# Altium PCB DIOT_Backplane_Mezzaine.PcbDoc
Units mm, origin at the board's own origin, x right, y up, seen from the top; angles counter-clockwise.
Board outline 50 x 112 mm, 4 copper layers (Top Layer, Layer 1, Layer 2, Bottom Layer), stack 1.58 mm thick; 34 components, 13 nets, 111 pads, 310 vias.
Unrouted connection lines stored in the file: 2.
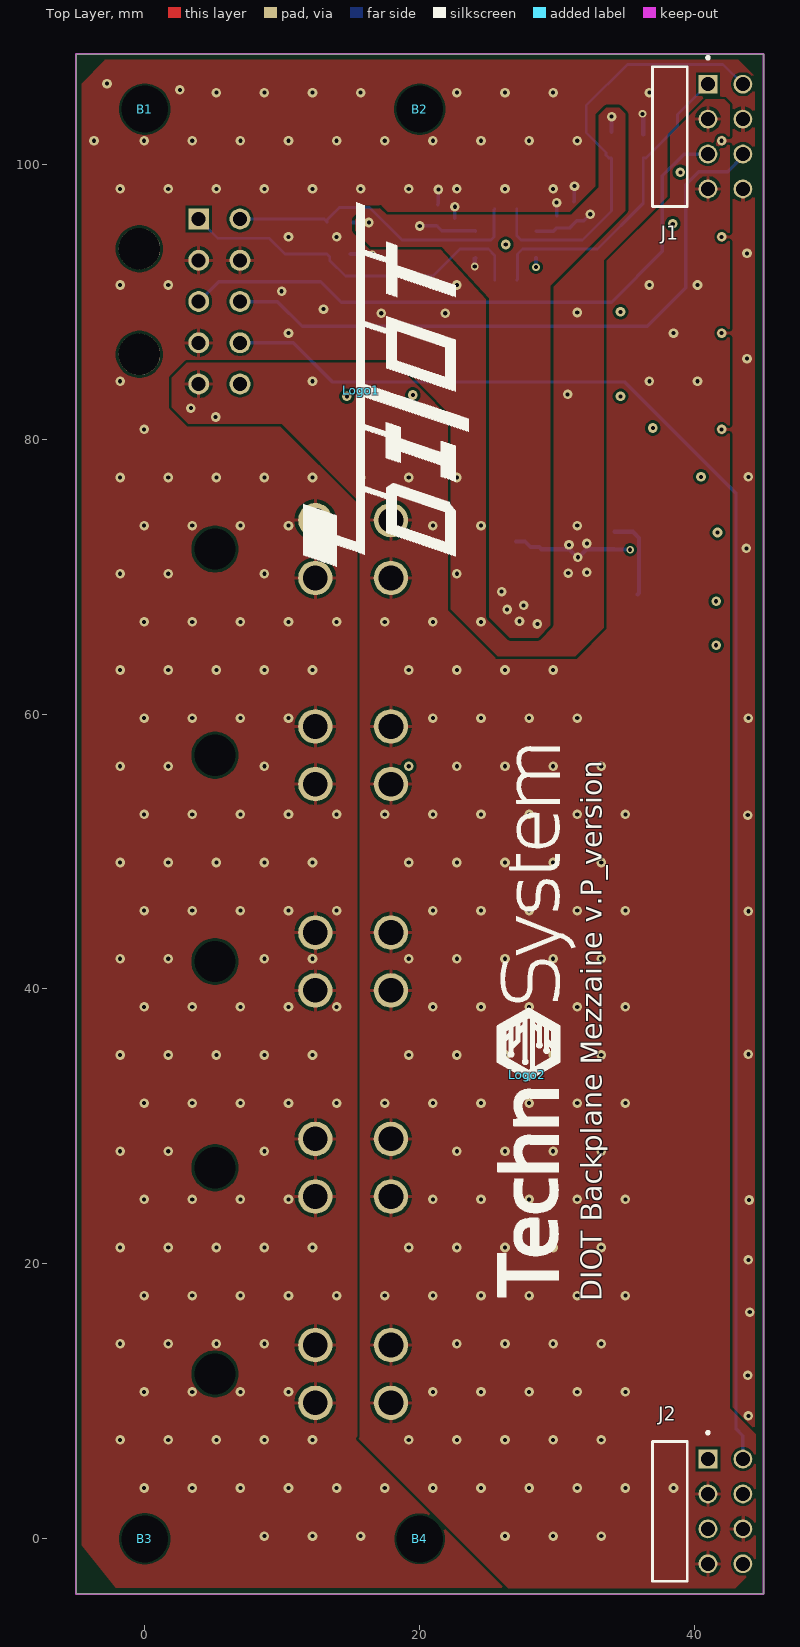
[diagram p0: Top Layer view]
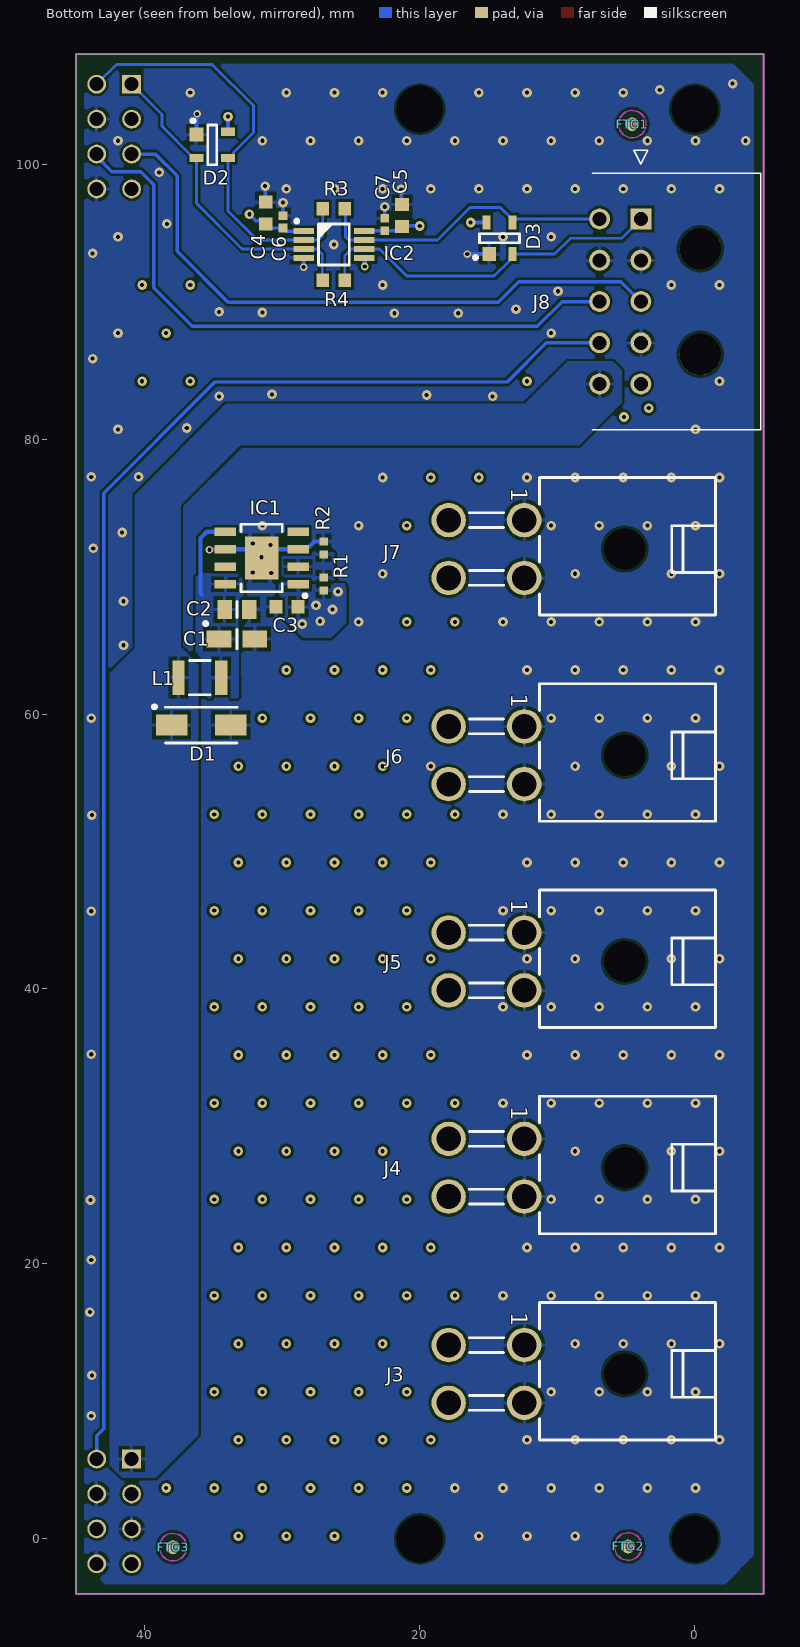
[diagram p1: Bottom Layer view, seen from below]
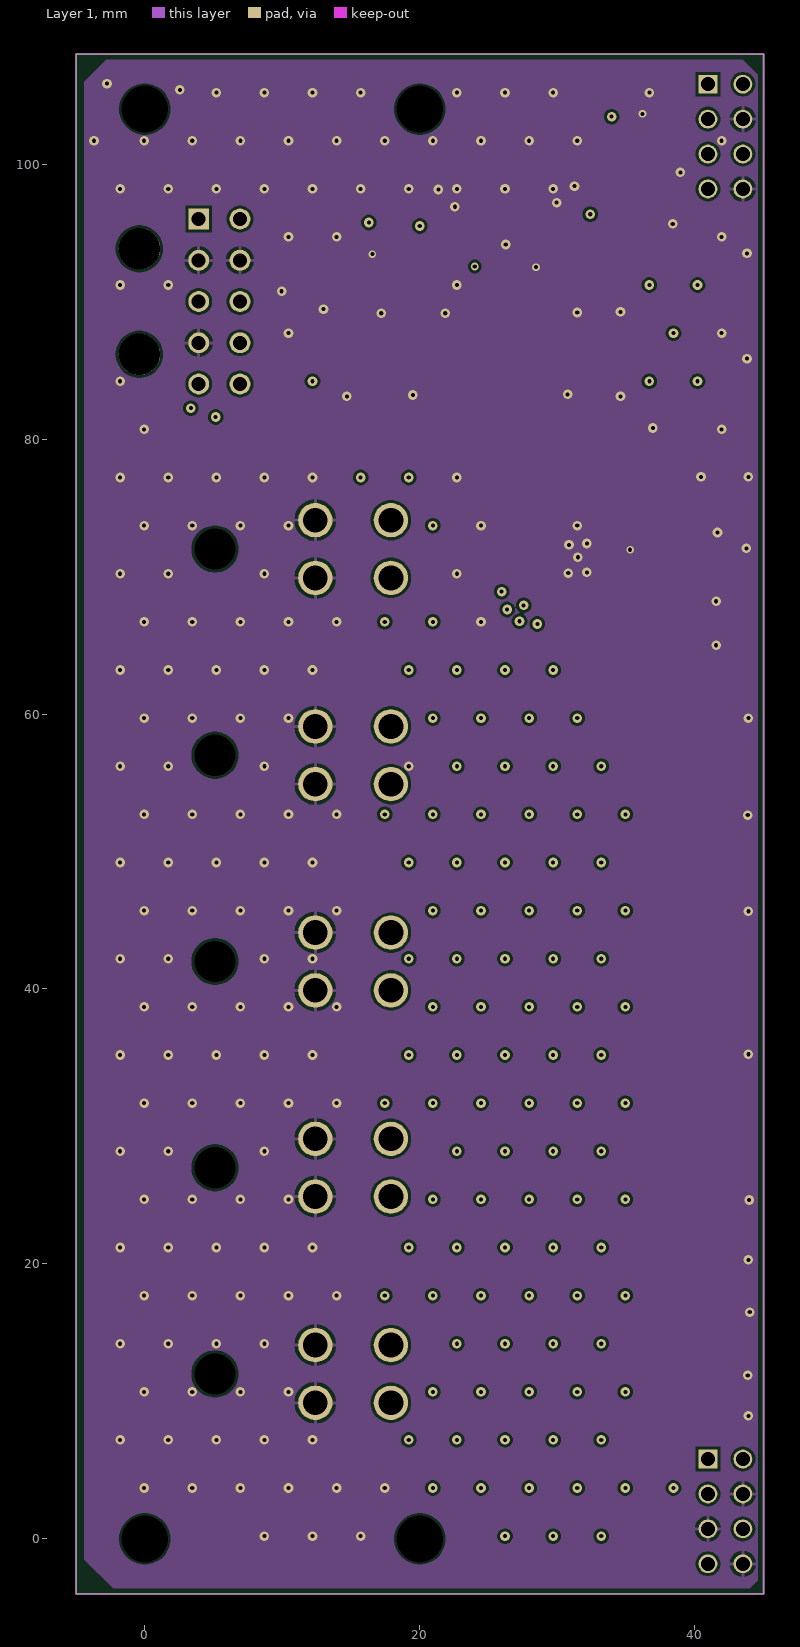
[diagram p2: Layer 1]
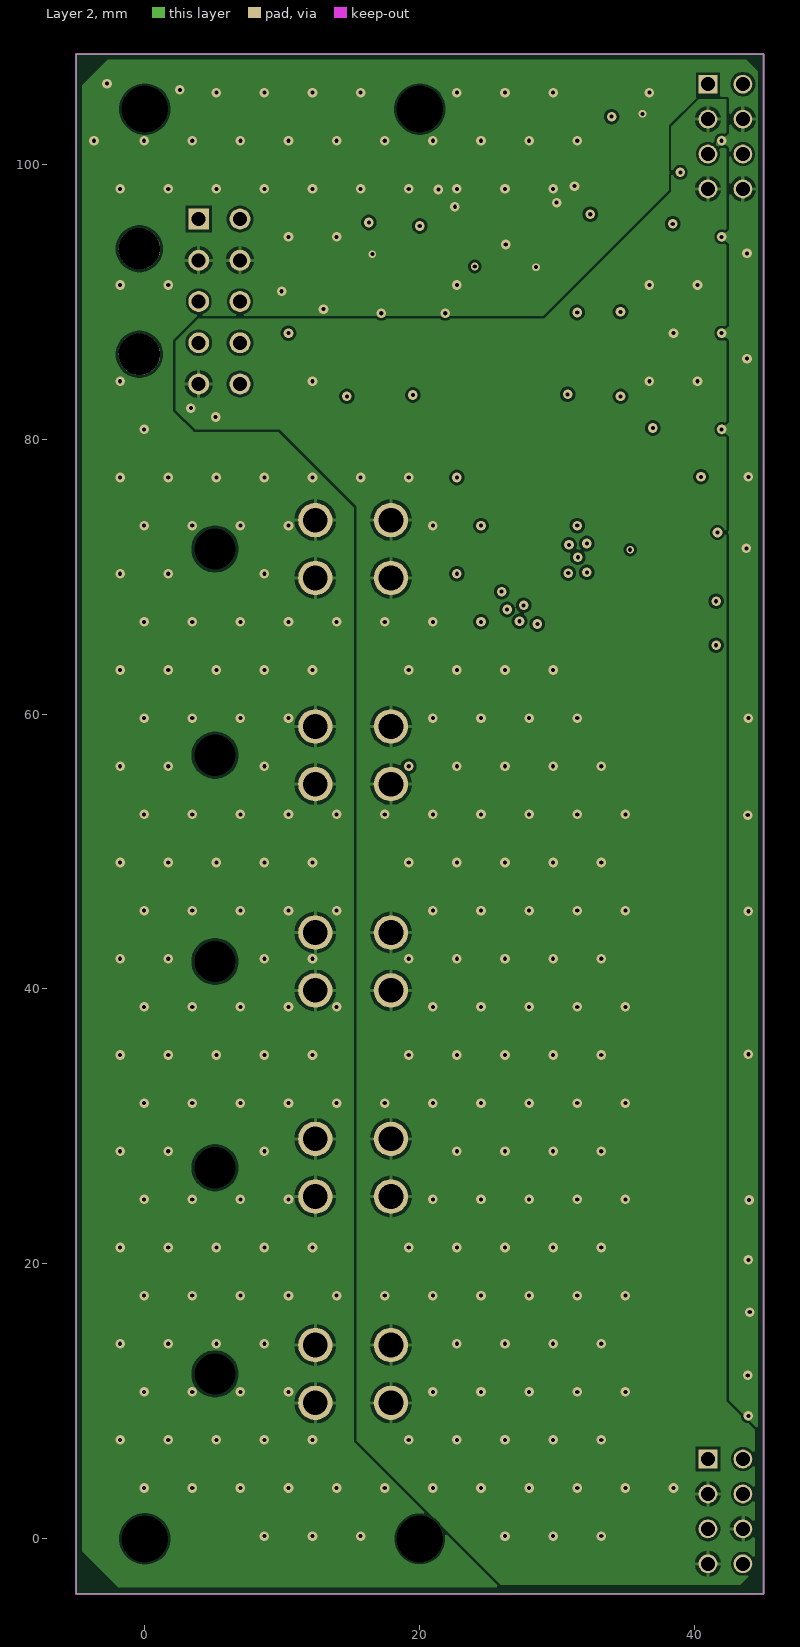
[diagram p3: Layer 2]
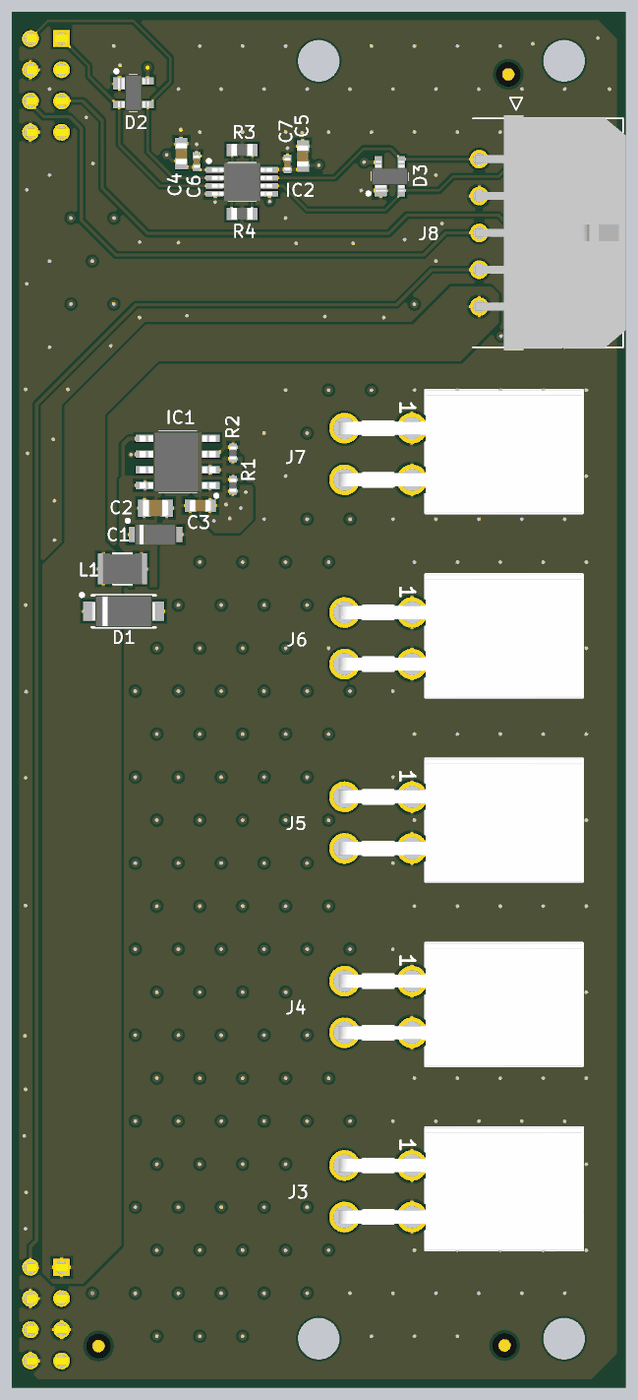
[diagram p4: 3D render of the assembled board from below, using the file's embedded part models]

## Layer stack, top to bottom
Top Solder: solder mask 0.01, Solder Resist, Dk 3.5
Top Layer: signal copper 0.035
Dielectric 1: prepreg 0.12, PP-017, Dk 4.3
Layer 1: signal copper 0.035
Dielectric1: core 1.2, FR-4, Dk 4.8
Layer 2: signal copper 0.035
Dielectric 4: prepreg 0.12, PP-017, Dk 4.3
Bottom Layer: signal copper 0.035
Bottom Solder: solder mask 0.01, Solder Resist, Dk 3.5

## Board outline
-5,-4 -5,108 45,108 45,-4

## Design rules (kind name [scope] priority, off if disabled: settings)
AcuteAngle [All] p1: minimum=4.50000000000000E+0001 checktracksonly=FALSE
BoardOutlineClearance [All] p1: gap=0.254 ignorepadtopadclearanceinfootprint=FALSE except(0: Arc-SplitContinuation Track-SplitContinuation SMDPad-SplitContinuation THPad-SplitContinuation Via-SplitContinuation Fill-SplitContinuation Poly-SplitContinuation Region-SplitContinuation Text-SplitContinuation; 0.4: Poly-OutlineEdge)
Clearance Clearance_Holes [InComponent('B1','B2','B3','B4')] p1: gap=0.15 ignorepadtopadclearanceinfootprint=FALSE
Clearance [All] p2: gap=0.2 ignorepadtopadclearanceinfootprint=FALSE
ComponentClearance [All] p1 off: gap=0 collisioncheckmode=3 verticalgap=0 showdistances=FALSE
FabricationTestPointUsage TestPointUsage [All] p1: valid=0 allowmultiple=FALSE
FabricationTestpoint Testpoint [(IsPad And (OnTopLayer Or OnBottomLayer))] p1: side=3 testpointundercomponent=TRUE minsize=1.016 maxsize=2.54 preferedsize=1.524 minholesize=0 maxholesize=1.016 preferedholesize=0.813 testpointgrid=0.025 allowsidetop=TRUE allowsidebottom=TRUE usegrid=TRUE gridtolerance=0
Height Height_Top [OnTop] p1 off: minheight=0 maxheight=12.7 prefheight=8.89
Height Height_Bot [OnBottom] p2 off: minheight=0 maxheight=1.651 prefheight=1.321
HoleSize [All] p1: absolutevalues=TRUE maxlimit=25.4 minlimit=0.025 maxpercent=80.000 minpercent=20.000
HoleToHoleClearance [All] p1: gap=0.127 allowstackedmicrovias=TRUE
Length [InNetClass('ADC0_D') or InNetClass('ADC1_D') or InNetClass('ADC1_D') or InNetClass('ADC3_D')] p1 off: maxlimit=17.5 minlimit=13.5
MatchedLengths [InNetClass('ADC0_D') or InNetClass('ADC1_D') or InNetClass('ADC1_D') or InNetClass('ADC3_D')] p1 off: tolerance=1 checknetsindiffpair=TRUE checkdiffpairvsdiffpair=FALSE checkxsignals=FALSE checkothers=FALSE
MinimumSolderMaskSliver [All] p1 off: minsoldermaskwidth=0.025
PlaneClearance [All] p1: clearance=0.254
PlaneConnect Vias_Plane [IsVia] p1: planeconnectstyle=Direct reliefexpansion=0.508 reliefentries=4 reliefconductorwidth=0.254 reliefairgap=0.254
PlaneConnect PlaneConnect_1 [All] p2: planeconnectstyle=Relief reliefexpansion=0.203 reliefentries=4 reliefconductorwidth=0.203 reliefairgap=0.203
PolygonConnect Direc [InPadClass(Direc)] p1: connectstyle=Direct reliefconductorwidth=0.254 reliefentries=4 polygonreliefangle="90 Angle" airgapwidth=0.254
PolygonConnect Vias [IsVia] p2: connectstyle=Direct reliefconductorwidth=0.254 reliefentries=4 polygonreliefangle="90 Angle" airgapwidth=0.254
PolygonConnect PolygonConnect_1 [All] p3: connectstyle=Relief reliefconductorwidth=0.254 reliefentries=4 polygonreliefangle="90 Angle" airgapwidth=0.254
RoutingVias [All] p1: holewidth=0.3 width=0.7 viastyle="Through Hole" minholewidth=0.2 minwidth=0.3 maxholewidth=0.4 maxwidth=0.8
SilkToSilkClearance [All] p1 off: silktosilkclearance=0.025
SilkToSolderMaskClearance SilkscreenOverComponentPads [IsPad] p1 off: minsilkscreentomaskgap=0.051 clearancetoexposedcopper=TRUE
SolderMaskExpansion SolderMaskExpansion_Via [IsVia] p1: expansion=0 istentingtop=TRUE
SolderMaskExpansion [All] p2: expansion=0.075 istentingtop=FALSE
SupplyNets "Schematic Supply Nets_1" [InNet('P3V3')] p1: voltage=0.000
SupplyNets "Schematic Supply Nets_3" [InNet('P5V')] p2: voltage=0.000
SupplyNets "Schematic Supply Nets_2" [InNet('GND')] p3: voltage=0.000
SupplyNets "Schematic Supply Nets" [InNet('P12V')] p4: voltage=0.000
UnRoutedNet [All] p1: checkbadconnections=TRUE
ViasUnderSMD [All] p1: allowed=TRUE
Width [All] p1: maxlimit=2.54 minlimit=0.123 preferedwidth=0.254 toplayer_minwidth=0.135 midlayer1_prefwidth=0.123 midlayer2_minwidth=0.127 midlayer2_prefwidth=0.127 bottomlayer_minwidth=0.135 minimp=50.000000 maximp=50.000000 favimp=50.000000
18 further rules are at their usual default settings.

## Components (designator, comment, footprint, x,y, rotation, side; value= is the part's Value field where it differs from the comment)
B1 "NON-PLATED_3.4" MTG340 0,104 r0 top
B2 "NON-PLATED_3.4" MTG340 20,104 r0 top
B3 "NON-PLATED_3.4" MTG340 0,0 r0 top
B4 "NON-PLATED_3.4" MTG340 20,0 r0 top
C1 "10uF" CAPMP3216X180N 33.3,65.45 r180 bottom
C2 "10uF" CAPC2012X135N 33.3,67.6 r180 bottom
C3 "1uF" CAPC1608X87N 29.65,67.8 r180 bottom
C4 "1uF" CAPC1608X87N 31.2,96.45 r270 bottom
C5 "1uF" CAPC1608X87N 21.3,96.25 r90 bottom
C6 "100nF" CAPC1005X55N 29.95,95.8 r270 bottom
C7 "100nF" CAPC1005X55N 22.55,95.6 r90 bottom
D1 "SMAJ5.0A" DIOM5226X262N 35.9,59.2 r180 bottom
D2 "PRTR5V0U2X" SOT190P230X110-4N 35.1,101.4 r180 bottom
D3 "PRTR5V0U2X" SOT190P230X110-4N 14.2,94.6 r90 bottom
FTG1 "Use only in PCB" FIDUCIAL_TOP_C100-200 4.55,102.9 r90 bottom
FTG2 "Use only in PCB" FIDUCIAL_TOP_C100-200 4.85,-0.55 r90 bottom
FTG3 "Use only in PCB" FIDUCIAL_TOP_C100-200 37.95,-0.6 r90 bottom
IC1 "ADP7102ARDZ-R7" SOIC127P600X175-9N-R241X309 31.5,71.35 r0 bottom
IC2 "TCA9803DGK" SOP65P490X110-8N 26.25,94.15 r180 bottom
J1 "TSW-104-08-F-D-RA" TSW-104-08-F-D-RA 40.96,102 r270 top locked
J2 "TSW-104-08-F-D-RA" TSW-104-08-F-D-RA 40.96,2 r270 top locked
J3 "Mini-Fit Jr.™" MOLEX_39-30-0040 15.15,12 r270 bottom locked
J4 "Mini-Fit Jr.™" MOLEX_39-30-0040 15.15,27 r270 bottom locked
J5 "Mini-Fit Jr.™" MOLEX_39-30-0040 15.15,42 r270 bottom locked
J6 "Mini-Fit Jr.™" MOLEX_39-30-0040 15.15,57 r270 bottom locked
J7 "Mini-Fit Jr.™" MOLEX_39-30-0040 15.15,72 r270 bottom locked
J8 "43045-1000" 43045-1000 3.92,90 r90 bottom locked
L1 "10uH" IND_MURATA_LQW32FT_0H 36,62.65 r180 bottom
Logo1 "DIOT_logo" DIOT_logo 15.75,83.55 r90 top
Logo2 "TS_Logo" TS_Logo 27.8,33.75 r90 top
R1 "51k" RESC1005X40N 27,69.45 r270 bottom
R2 "30k" RESC1005X40N 27,72.08 r270 bottom
R3 "0" RESC1608X55N 26.25,96.75 r180 bottom
R4 "0" RESC1608X55N 26.25,91.55 r180 bottom

## Footprints (in the part's own frame and the unit in brackets; to place one, negate y for a bottom-side part, rotate by r counter-clockwise, add the part's x,y. Pads: shape width x height; smd on the part's side, far side on the other; paste and mask are expansions set on the pad)
43045-1000 [mm]
  rect 1.52x1.52 hole 1.02: 1(6,0)
  round 1.52 hole 1.02: 2(3,0) 3(0,0) 4(-3,0) 5(-6,0) 6(6,3) 7(3,3) 8(0,3) 9(-3,3) 10(-6,3)
  round 3 hole 3 unplated: 11(3.84,-4.32) 12(-3.84,-4.32)
  silkscreen extent -9.33,-8.72 11,3.52, body extent -9.57,-8.92 9.57,3.32, height 8.67
CAPC1005X55N [mm] "Capacitor, Non-Polarized, Chip; 1.00mm L X 0.50mm W X 0.70mm H, IPC Medium Density"
  rect 0.62x0.62 smd: 1(-0.45,0) 2(0.45,0)
  body extent -0.52,-0.27 0.53,0.28, height 0.55
CAPC1608X87N [mm] "Chip Capacitor, Body 1.6x0.8mm IPC Medium Density"
  rect 0.95x1 smd: 1(-0.8,0) 2(0.8,0)
  body extent -0.87,-0.47 0.88,0.48, height 0.87
CAPC2012X135N [mm] "Chip Capacitor, Body 2.0x1.25mm, IPC Medium Density"
  rect 1.05x1.4 smd: 1(-0.9,0) 2(0.9,0)
  silkscreen extent 0,-0.58 0,0.58, body extent -1.05,-0.67 1.05,0.68, height 1.25
CAPMP3216X180N [mm] "Capacitor, Polarized, Molded  Body 3.2x1.6mm, IPC Medium Density"
  rect 1.8x1.25 smd: 1(-1.3,0) 2(1.3,0)
  silkscreen extent -2.4,-0.7 0,1.25, body extent -1.7,-0.9 1.7,0.9, height 1.6
DIOM5226X262N [mm] "DO-214-AC/SMA Diode, Molded Body; 5.21mm L X 2.605mm W X 2.62mm H, IPC Medium Density"
  rect 2.3x1.55 smd: 1(-2.15,0) 2(2.15,0)
  silkscreen extent -3.53,-1.3 2.6,1.45, body extent -2.6,-1.3 2.6,1.31, height 2.62
DIOT_logo [mm]
  silkscreen extent -12.83,-7.81 13.66,4.24
FIDUCIAL_TOP_C100-200 [mm] "Round Fiducial Target, Top Layer, 1.0mm, Top Solder 2.0mm, Keepout =2.0mm"
  round 1 smd paste-0.51 mask+0.5: FTG2(0,0)
  Top Layer keep-out circle w0.1: c0,0 r1
IND_MURATA_LQW32FT_0H [mm] "SMT inductor 1210, Body Width 2.50mm Body Lenght 3.20mm Height 2.50mm"
  rect 0.9x2.5 smd: 1(-1.55,0) 2(1.55,0)
  silkscreen extent -0.75,-1.25 0.75,1.25, body extent -1.6,-1.25 1.6,1.25, height 2.5
MOLEX_39-30-0040 [mm] "4.20mm (.165\") Pitch Mini-Fit Jr. Header, Dual Row, Right Angle with Snap-in Plastic Peg PCB Lock, 4 Circuits"
  round 2.5 hole 1.8: 1(-2.1,2.75) 2(2.1,2.75) 3(-2.1,-2.75) 4(2.1,-2.75)
  round 1 hole 3 unplated mask+1: 5(0,10.05)
  silkscreen extent -5.2,-1.24 4.8,16.65, body extent -5.2,-3.28 4.8,16.65, height 11.4
MTG340 [mm]
  round 0.5 hole 3.4 unplated mask+1.35: 1(0,0)
RESC1005X40N [mm] "Chip Resistor, EIA 0402, Metric 1005, Body 1.0x0.5mm, IPC Medium Density"
  rect 0.58x0.62 smd: 1(-0.47,0) 2(0.47,0)
  body extent -0.52,-0.27 0.53,0.28, height 0.4
RESC1608X55N [mm] "Chip Resistor, EIA 0603, Metric 1608, Body 1.6x0.8mm, IPC Medium Density"
  rect 0.9x1 smd: 1(-0.8,0) 2(0.8,0)
  body extent -0.87,-0.47 0.88,0.48, height 0.55
SOIC127P600X175-9N-R241X309 [mm] "SOIC 8, Pitch 1.27mm - Body 3.9x4.9mm, (w/thermal tab 2.41mm X 3.098mm), IPC Medium Density"
  rect 1.55x0.6 smd: 1(-2.65,1.905) 2(-2.65,0.635) 3(-2.65,-0.635) 4(-2.65,-1.905) 5(2.65,-1.905) 6(2.65,-0.635) 7(2.65,0.635) 8(2.65,1.905)
  rect 2.41x3.098 smd: 9(0,0)
  silkscreen extent -3.27,-2.45 1.5,2.87, body extent -3.1,-2.5 3.1,2.5, height 1.75
SOP65P490X110-8N [mm] "SOP, 0.65mm pitch; 8 pin, 3.00mm W X 3.00mm L X 1.10mm H body, IPC Medium Density"
  rect 1.5x0.45 smd: 1(-2.2,0.975) 2(-2.2,0.325) 3(-2.2,-0.325) 4(-2.2,-0.975) 5(2.2,-0.975) 6(2.2,-0.325) 7(2.2,0.325) 8(2.2,0.975)
  silkscreen extent -2.83,-1.5 1.12,1.82, body extent -2.45,-1.55 2.45,1.55, height 1.1
SOT190P230X110-4N [mm] "SOT143, SOT, 1.90mm Pitch; 4 Pin, 1.30mm W X 2.90mm L X 1.10mm H body, IPC Medium Density"
  rect 1x1 smd: 1(-1.15,0.75)
  rect 1x0.6 smd: 2(-1.15,-0.95) 3(1.15,-0.95) 4(1.15,0.95)
  silkscreen extent -1.53,-1.45 0.33,1.87, body extent -1.25,-1.5 1.25,1.5, height 1.1
TS_Logo [mm]
  silkscreen extent -16.14,-3.52 23.86,2.11
TSW-104-08-F-D-RA [mm]
  rect 1.37x1.37 hole 1.02: 1(-3.81,0)
  round 1.37 hole 1.02: 2(-3.81,2.54) 3(-1.27,0) 4(-1.27,2.54) 5(1.27,0) 6(1.27,2.54) 7(3.81,0) 8(3.81,2.54)
  silkscreen extent -5.83,-4.04 5.08,0.1, body extent -5.08,-9.91 5.08,2.86, height 5.56

## Part data
B1 B2 B3 B4: library part CMP-00028-00013-2, "Non Plated hole with diameter 3.4MM for screw M3"
C1: library part CTE3216-18_10UF_16V_20%_AVX_TCJ, "Polarised capacitor", Case=A, Manufacturer=AVX, Manufacturer Part Number="TCJA106M016R0200 or  or TR3A106K016C1700", Tolerance=±20%, Voltage=16V, Author="CERN DEM JLC", Component Type=Standard, ComponentHeight=1.8mm, CreateDate=29.03.2012, HelpURL=\\cern.ch\dfs\Applications\Altium\Datasheets\CTE_AVX_TCJ.pdf, LatestRevisionDate=29.03.2012, Mounted=Yes, Part Description="ESR 0R200 Tantalum Solid Electrolytic Chip Capacitor with Conductive Polymer Electrode", Part Number=CTE3216-18_10UF_16V_20%_AVX_TCJ, Pin Count=2, Sense=No, SMD=Yes, Socket=No, Status=Preferred
C2: library part CC0805_10UF_16V_10%_X5R, "Non-polarised capacitor", Case=0805, Manufacturer=GENERIC, Manufacturer1 ComponentHeight=1.4mm, Manufacturer1 Example=KEMET, Manufacturer1 Part Number=C0805C106K4PAC, Tolerance=±10%, Voltage=16V, Author="CERN DEM JLC", Component Type=Standard, CreateDate=03.12.2007, HelpURL=\\cern.ch\dfs\Applications\Altium\Datasheets\CC1206_X5R_KEMET.pdf, LatestRevisionDate=03.12.2007, Manufacturer Part Number=CC0805_10UF_16V_10%_X5R, Mounted=Yes, Part Description="SMD Multilayer Chip Ceramic Capacitor", Part Number=CC0805_10UF_16V_10%_X5R, Pin Count=2, Sense=No, SMD=Yes, Socket=No, Status=Preferred, TC=X5R
C3 C4 C5: library part CC0603_1UF_25V_10%_X7R, "Non-polarised capacitor", Case=0603, Manufacturer=GENERIC, Manufacturer1 ComponentHeight=0.9mm, Manufacturer1 Example=MURATA, Manufacturer1 Part Number=GRM188R71E105KA12D, Tolerance=±10%, Voltage=25V, Author="CERN DEM JLC", Component Type=Standard, CreateDate=18/01/2011, HelpURL=\\cern.ch\dfs\Applications\Altium\Datasheets\CC0603_X7R_MURATA.pdf, LatestRevisionDate=18/01/2011, Manufacturer Part Number=CC0603_1UF_25V_10%_X7R, Mounted=Yes, Part Description="SMD Multilayer Chip Ceramic Capacitor", Part Number=CC0603_1UF_25V_10%_X7R, Pin Count=2, Sense=No, SMD=Yes, Socket=No, Status=None, TC=X7R
C6 C7: library part CC0402_100NF_16V_10%_X7R, "Non-polarised capacitor", Case=0402, Manufacturer=GENERIC, Manufacturer1 ComponentHeight=0.55mm, Manufacturer1 Example=MURATA, Manufacturer1 Part Number=GRM155R71C104KA88D, Tolerance=±10%, Voltage=16V, Author="CERN DEM JLC", Component Type=Standard, CreateDate=05.12.2013, HelpURL=\\cern.ch\dfs\Applications\Altium\Datasheets\CC0402_X7R_MURATA_GRM.pdf, LatestRevisionDate=03.12.2007, Manufacturer Part Number=CC0402_100NF_16V_10%_X7R, Mounted=Yes, Part Description="SMD Multilayer Chip Ceramic Capacitor", Part Number=CC0402_100NF_16V_10%_X7R, Pin Count=2, Sense=No, SMD=Yes, Socket=No, Status="Not Recommended", TC=X7R
D1: "Transient Voltage Suppressor Diode (Uni-Directional)", Case=DO-214AC, Manufacturer=BOURNS, Power=400W, Voltage=5V, Author="CERN DEM MR", Bonding=No, Component Type=Standard, ComponentHeight=2.62mm, CreateDate=14.07.2016, Device=SMAJ5.0A, HelpURL=\\cern.ch\dfs\Applications\Altium\Datasheets\SMAJ5.0A.pdf, LatestRevisionDate=14.07.2016, Manufacturer Part Number=SMAJ5.0A, Mounted=Yes, PackageDescription="DO-214-AC/SMA Diode, Molded Body; 5.21mm L X 2.605mm W X 2.62mm H, IPC Medium Density", Part Description="Surface Mount Uni-directional Transient Voltage Suppressor Diode", Part Number=SMAJ5.0A, Pin Count=2, PressFit=No, Sense=No, SMD=Yes, Socket=No
D2 D3: "Ultra Low Capacitance Double Rail-to-Rail ESD Protection Diode", Case=SOT143B, Manufacturer="NXP SEMICONDUCTORS", Voltage=5.5V, Author="CERN DEM JLC", Bonding=No, Component Type=Standard, ComponentHeight=1.1mm, CreateDate=22.03.2011, Device=PRTR5V0U2X, HelpURL=\\cern.ch\dfs\Applications\Altium\Datasheets\PRTR5V0U2X.pdf, LatestRevisionDate=22.03.2011, Manufacturer Part Number=PRTR5V0U2X, Mounted=Yes, PackageDescription="SOT143B, SOT, 1.90mm Pitch; 4 Pin, 1.30mm W X 2.90mm L X 1.10mm H body, IPC Medium Density", Part Description="Ultra Low Capacitance (1pF) Double Rail-to-Rail ESD Protection Diode (8kV)", Part Number=PRTR5V0U2X, Pin Count=4, PressFit=No, Sense=No, SMD=Yes, Socket=No
FTG1 FTG2 FTG3: library part FIDUCIAL_TARGET_c100-200, "Fiducial Target", Part Number=FIDUCIAL_TARGET_C100-200, Author="CERN DEM JLC", Component Type="Standard (No BOM)", ComponentHeight=0mm, CreateDate=09/02/2010, Family=Fiducial, HelpURL=Undefined, LatestRevisionDate=04/04/2012, Mounted=No, PackageDescription="Round Fiducial Target, Top Layer, 1.0mm, Top Solder 2.0mm, Keepout =2.0mm", Part Description="Round Fiducial Target, Top Layer, 1.0mm, Top Solder 2.0mm, Keepout =2.0mm", Pin Count=1, Sense=No, SMD=Yes, Socket=No, Status=None
IC1: "1.22V to 19V, 300mA, Low Noise, CMOS LDO Adjustable Linear Regulator", Case=SOIC8, Manufacturer="ANALOG DEVICES", Author="CERN DEM JLC", Bonding=No, Component Type=Standard, ComponentHeight=1.75mm, CreateDate=16.06.2014, Device=ADP7102ARDZ-R7, HelpURL=\\cern.ch\dfs\Applications\Altium\Datasheets\ADP7102ARDZ-R7.pdf, LatestRevisionDate=16.06.2014, Manufacturer Part Number=ADP7102ARDZ-R7, Mounted=Yes, PackageDescription="SOIC 8, Pitch 1.27mm - Body 3.9x4.9mm, (w/thermal tab 2.41mm X 3.098mm), IPC Medium Density", Part Description="1.22V to 19V, 300mA, Low Noise, CMOS LDO Adjustable Linear Regulator", Part Number=ADP7102ARDZ-R7, Pin Count=8, PressFit=No, Sense=No, SMD=Yes, Socket=No
IC2: "Level-Translating I2C Bus Buffer/Repeater", Case=TSSOP8, Manufacturer="TEXAS INSTRUMENTS", Author="CERN DEM HF", Bonding=No, Component Type=Standard, ComponentHeight=1.1mm, CreateDate=09.08.2023, Device=TCA9803DGK, HelpURL=\\cern.ch\dfs\Applications\Altium\Datasheets\TCA9803DGK.pdf, LatestRevisionDate=09.08.2023, Manufacturer Part Number=TCA9803DGK, Mounted=Yes, PackageDescription="SOP, 0.65mm Pitch; 8 Pin, 3.00mm W X 3.00mm L X 1.10mm H body, IPC Medium Density", Part Description="Level-Translating I2C Bus Buffer/Repeater", Part Number=TCA9803DGK, Pin Count=8, PressFit=No, Sense=No, SMD=Yes, Socket=No
J1 J2: library part CMP-002-04654-4, "Board Connector, 8 Contact(s), 2 Row(s), Male, Right Angle, 0.1 inch Pitch, Solder Terminal, Black Insulator", Connector Type="BOARD CONNECTOR", Mounting Technology=Board, RoHS Compliant=Yes
J3 J4 J5 J6 J7: library part MOLEX_39-30-0040, "Connector 4 Male", Manufacturer=MOLEX, Manufacturer Part Number=39-30-0040, Author="CERN DEM JLC", Component Type=Standard, ComponentHeight=11.4mm, CreateDate=02.10.2018, Family="Mini-Fit Jr.™", HelpURL=\\cern.ch\dfs\Applications\Altium\Datasheets\MOLEX_39-30-0040.pdf, LatestRevisionDate=02.10.2018, Mounted=Yes, Part Description="4.20mm (.165\") Pitch Mini-Fit Jr. Header, Dual Row, Right Angle with Snap-in Plastic Peg PCB Lock, 4 Circuits", Part Number=MOLEX_39-30-0040, Pin Count=4, PressFit=No, Sense=No, SMD=No, Socket=No, Status=None
J8: library part CMP-002-04656-3, "Rectangular Power Connector, 10 Contact(s), Male, Solder Terminal, Receptacle", Max Operating Temperature=105°C, Min Operating Temperature=-40°C, Connector Type=Power,Rectangular, Mounting Technology=Board, RoHS Compliant=Yes
L1: library part IND1210_10UH_20%_MURATA_LQW32FT100M0H, "Inductor With Core", Case=1210, Manufacturer=MURATA, Manufacturer Part Number=LQW32FT100M0H, Power=500mA, Resistance=0R4, Tolerance=±20%, Author="CERN DEM BC", Component Type=Standard, ComponentHeight=2.5mm, CreateDate=18.05.2020, HelpURL=\\cern.ch\dfs\Applications\Altium\Datasheets\IND_MURATA_LQW32FT100M0H.pdf, LatestRevisionDate=18.05.2020, Mounted=Yes, Part Description="Wide Frequency Band, High Inductance, For Power Line", Part Number=IND1210_10UH_20%_MURATA_LQW32FT100M0H, Pin Count=2, Sense=No, SMD=Yes, Socket=No, Status=None
Logo1: library part CMP-00028-00011-1, "Logo of DI/OT system"
Logo2: library part CMP-00028-00008-1, "Logo of TechnoSystem"
R1: library part R0402_51K_1%_0.0625W_100PPM, "Resistor - 1%", Case=0402, Manufacturer=GENERIC, Manufacturer1 ComponentHeight=0.4mm, Manufacturer1 Example="YAGEO PHYCOMP", Manufacturer1 Part Number=232270674703L, Power=0.0625W, Tolerance=±1%, Author="CERN DEM JLC", Component Type=Standard, CreateDate=03.12.2007, HelpURL=\\cern.ch\dfs\Applications\Altium\Datasheets\R0402_Phycomp_RC0402.pdf, LatestRevisionDate=17.10.2012, Manufacturer Part Number=R0402_51K_1%_0.0625W_100PPM, Mounted=Yes, Part Description="General Purpose Thick Film Chip Resistor", Part Number=R0402_51K_1%_0.0625W_100PPM, Pin Count=2, PressFit=No, Sense=No, SMD=Yes, Socket=No, Status="Not Recommended", TC=±100ppm/°C
R2: library part R0402_30K_1%_0.0625W_100PPM, "Resistor - 1%", Case=0402, Manufacturer=GENERIC, Manufacturer1 ComponentHeight=0.4mm, Manufacturer1 Example="YAGEO PHYCOMP", Manufacturer1 Part Number=232270673003L, Power=0.0625W, Tolerance=±1%, Author="CERN DEM JLC", Component Type=Standard, CreateDate=03.12.2007, HelpURL=\\cern.ch\dfs\Applications\Altium\Datasheets\R0402_Phycomp_RC0402.pdf, LatestRevisionDate=17.10.2012, Manufacturer Part Number=R0402_30K_1%_0.0625W_100PPM, Mounted=Yes, Part Description="General Purpose Thick Film Chip Resistor", Part Number=R0402_30K_1%_0.0625W_100PPM, Pin Count=2, PressFit=No, Sense=No, SMD=Yes, Socket=No, Status="Not Recommended", TC=±100ppm/°C
R3 R4: library part R0603_0R_JUMPER, "Resistor", Case=0603, Manufacturer=GENERIC, Manufacturer1 ComponentHeight=0.55mm, Manufacturer1 Example="NIC COMPONENT", Manufacturer1 Part Number=NRC06Z0, Author="CERN DEM JLC", Component Type=Standard, CreateDate=03.12.2007, HelpURL=\\cern.ch\dfs\Applications\Altium\Datasheets\R0603_NIC_NRC.pdf, LatestRevisionDate=13.03.2008, Manufacturer Part Number=R0603_0R_JUMPER, Mounted=Yes, Part Description="1A (0.05R Max DC Resistance) Zero Ohm Jumper", Part Number=R0603_0R_JUMPER, Pin Count=2, PressFit=No, Sense=No, SMD=Yes, Socket=No, Status=Preferred

## Via types
v1: diameter 0.7, hole 0.3, Top Layer to Bottom Layer, tented both sides, 305 vias
v2: diameter 0.55, hole 0.3, Top Layer to Bottom Layer, tented both sides, 5 vias

## Nets (pads, with @x,y where several pads share a name; then routed paths per layer and width w, separated by ;. In a path a pad name is that pad's centre, name@x,y a point inside that pad or via, vN(x,y) a via of type N, cw(c..) or ccw(c..) an arc to the next point about the centre after c; other vN are vias at no path point)
F_IO0: J1.6 J8.8 | length 47
  Bottom Layer w0.25: J8.8 9.65,90 11.45,88.2 36.55,88.2 39.35,91 39.35,98.5 40.3,99.45 42.4,99.45 43.5,100.55 J1.6
F_IO1: J2.2 J8.9 | length 111.1
  Bottom Layer w0.25: J8.9 10.8,87 13.65,84.15 34.9,84.15 43,76.05 43,8 43.5,7.5 J2.2
F_RST: J1.5 J8.3 | length 45.9
  Bottom Layer w0.25: J8.3 5.37,91.45 12.8,91.45 14.3,89.95 33.95,89.95 37.65,93.65 37.65,99.15 39.23,100.73 J1.5
F_SCL: D3.3 IC2.7 J8.6 R3.2 | length 22.3
  Bottom Layer w0.2: J8.6 13.05,96 13.25,95.8 D3.3 13.25,95.95 13.45,96.15 14.15,96.85 16.35,96.85 18.725,94.475 IC2.7 25.175,94.475 25.4,94.7 25.4,96.7 R3.2
F_SDA: D3.2 IC2.6 J8.1 R4.2 | length 26.2
  Bottom Layer w0.2: J8.1 5.32,94.6 9.05,94.6 10.2,93.45 D3.2 13.45,93.25 13.45,93 14.6,91.85 20.95,91.85 22.925,93.825 IC2.6 24.058,93.817 24.983,93.817 25.45,93.35 R4.2
GND: C1.2 C2.2 C3.1 C4.1 C5.2 C6.1 C7.2 D1.2 D2.1 D3.1 IC1.3 IC1.6 IC1.9 IC2.4 J1.4 J1.8 J2.4 J2.5 J2.8 J3.1 J3.2 J4.1 J4.2 J5.1 J5.2 J6.1 J6.2 J7.1 J7.2 J8.2 J8.4 J8.7 R2.1 | length 17
  Bottom Layer w0.25: C5.2 21.35,97.1 v1(21.35,98.15) ; C7.2 v1(22.55,96.9) ; C6.1 v1(29.95,97.2) ; C4.1 31.25,97.3 v1(31.25,98.4)
  Bottom Layer w0.3: D3.1 v2(16.55,93.45) ; R2.1 27.65,72.55 28.065,72.135 28.7,72.135 IC1.3 30.865,71.985 IC1.9 32.135,71.985 IC1.6 34.167,71.968 35.282,71.968 v2(35.3,71.95) ; v2(28.45,92.5) IC2.4 ; v2(36.2,103.65) 36.2,103.582 36.25,103.532 D2.1
  other v1: 8.7,0.2 12.2,0.2 15.7,0.2 -0.05,3.7 3.45,3.7 6.95,3.7 10.45,3.7 13.95,3.7 17.45,3.7 -1.8,7.2 1.7,7.2 5.2,7.2 8.7,7.2 12.2,7.2 43.9,8.95 -0.05,10.7 3.45,10.7 6.95,10.7 10.45,10.7 43.85,11.9 -1.8,14.2 1.7,14.2 5.2,14.2 8.7,14.2 44,16.5 -0.05,17.7 3.45,17.7 6.95,17.7 10.45,17.7 13.95,17.7 43.9,20.3 -1.8,21.2 1.7,21.2 5.2,21.2 8.7,21.2 12.2,21.2 43.95,24.65 -0.05,24.7 3.45,24.7 6.95,24.7 10.45,24.7 -1.8,28.2 1.7,28.2 8.7,28.2 -0.05,31.7 3.45,31.7 6.95,31.7 10.45,31.7 13.95,31.7 -1.8,35.2 1.7,35.2 5.2,35.2 8.7,35.2 12.2,35.2 43.9,35.25 -0.05,38.7 3.45,38.7 6.95,38.7 10.45,38.7 13.95,38.7 -1.8,42.2 1.7,42.2 8.7,42.2 12.2,42.2 43.9,45.65 -0.05,45.7 3.45,45.7 6.95,45.7 10.45,45.7 13.95,45.7 -1.8,49.2 1.7,49.2 5.2,49.2 8.7,49.2 12.2,49.2 43.85,52.65 -0.05,52.7 3.45,52.7 6.95,52.7 10.45,52.7 13.95,52.7 -1.8,56.2 1.7,56.2 8.7,56.2 19.2,56.2 -0.05,59.7 3.45,59.7 6.95,59.7 10.45,59.7 43.9,59.7 -1.8,63.2 1.7,63.2 5.2,63.2 8.7,63.2 12.2,63.2 41.55,65 -0.05,66.7 3.45,66.7 6.95,66.7 10.45,66.7 13.95,66.7 24.45,66.7 41.55,68.2 -1.8,70.2 1.7,70.2 8.7,70.2 22.7,70.2 30.8,70.25 32.15,70.3 31.5,71.4 43.75,72.05 30.85,72.3 32.15,72.4 41.65,73.2 -0.05,73.7 3.45,73.7 6.95,73.7 10.45,73.7 24.45,73.7 31.45,73.7 -1.8,77.2 1.7,77.2 5.2,77.2 8.7,77.2 12.2,77.2 22.7,77.2 40.45,77.25 43.9,77.25 -0.05,80.7 41.95,80.7 36.95,80.8 14.7,83.1 34.6,83.1 19.5,83.2 30.75,83.25 -1.8,84.2 43.8,85.85 10.45,87.7 41.95,87.7 17.2,89.15 21.85,89.15 31.45,89.2 34.6,89.25 13,89.45 9.95,90.75 -1.8,91.2 1.7,91.2 22.7,91.2 43.8,93.5 26.25,94.15 10.45,94.7 13.95,94.7 41.95,94.7 38.4,95.65 -1.8,98.2 1.7,98.2 5.2,98.2 8.7,98.2 12.2,98.2 15.7,98.2 19.2,98.2 22.7,98.2 26.2,98.2 29.7,98.2 38.95,99.4 -3.7,101.7 -0.05,101.7 3.45,101.7 6.95,101.7 10.45,101.7 13.95,101.7 17.45,101.7 20.95,101.7 24.45,101.7 27.95,101.7 31.45,101.7 41.95,101.7 5.2,105.2 8.7,105.2 12.2,105.2 15.7,105.2 22.7,105.2 26.2,105.2 29.7,105.2 36.7,105.2 2.55,105.4 -2.75,105.85
M_SCL: D2.3 IC2.2 J1.2 R3.1 | length 31.6
  Bottom Layer w0.2: R3.1 27.05,94.8 27.375,94.475 31.825,94.475 33.95,96.6 D2.3 33.75,100.45 33.55,100.65 33.55,100.85 32.1,102.3 32.1,104.25 35.1,107.25 42.06,107.25 J1.2
M_SDA: D2.2 IC2.3 J1.1 R4.1 | length 23.3
  Bottom Layer w0.2: R4.1 27.1,91.6 27.1,93.45 27.467,93.817 28.442,93.817 IC2.3 32.925,93.825 36.25,97.15 D2.2 36.45,100.45 38.75,102.75 38.75,103.6 J1.1
NetC1_1: C1.1 C2.1 IC1.5 IC1.8 L1.2 | length 6.1
  Bottom Layer w0.3: IC1.5 35.495,73.255 35.95,72.8 35.95,68.8 35.85,68.7
NetIC1_2: IC1.2 R1.1 R2.2
P3V3: C3.2 C4.2 C5.1 C6.2 C7.1 D2.4 D3.4 IC1.1 IC2.1 IC2.5 IC2.8 R1.2 | length 11.6
  Bottom Layer w0.25: v1(20,95.5) 21.25,95.5 C5.1 21.6,95.15 C7.1 24.025,95.15 IC2.8 ; IC2.1 29.725,95.125 C6.2 30.9,95.35 C4.2 31.429,95.879 31.929,95.879 v1(32.4,96.35)
  Bottom Layer w0.3: D3.4 v1(16.3,95.75) ; v2(24,92.55) 24,93.125 IC2.5 ; D2.4 v1(33.95,103.45)
  other v1: 28.55,66.55 27.25,66.75 26.35,67.6 27.55,67.9 25.95,68.9
P5V: D1.1 J2.1 J8.10 L1.1
P12V: J1.3 J1.7 J2.3 J2.6 J2.7 J3.3 J3.4 J4.3 J4.4 J5.3 J5.4 J6.3 J6.4 J7.3 J7.4 J8.5
  other v1: 26.2,0.2 29.7,0.2 33.2,0.2 20.95,3.7 24.45,3.7 27.95,3.7 31.45,3.7 34.95,3.7 38.45,3.7 19.2,7.2 22.7,7.2 26.2,7.2 29.7,7.2 33.2,7.2 20.95,10.7 24.45,10.7 27.95,10.7 31.45,10.7 34.95,10.7 22.7,14.2 26.2,14.2 29.7,14.2 33.2,14.2 17.45,17.7 20.95,17.7 24.45,17.7 27.95,17.7 31.45,17.7 34.95,17.7 19.2,21.2 22.7,21.2 26.2,21.2 29.7,21.2 33.2,21.2 20.95,24.7 24.45,24.7 27.95,24.7 31.45,24.7 34.95,24.7 22.7,28.2 26.2,28.2 29.7,28.2 33.2,28.2 17.45,31.7 20.95,31.7 24.45,31.7 27.95,31.7 31.45,31.7 34.95,31.7 19.2,35.2 22.7,35.2 26.2,35.2 29.7,35.2 33.2,35.2 20.95,38.7 24.45,38.7 27.95,38.7 31.45,38.7 34.95,38.7 19.2,42.2 22.7,42.2 26.2,42.2 29.7,42.2 33.2,42.2 20.95,45.7 24.45,45.7 27.95,45.7 31.45,45.7 34.95,45.7 19.2,49.2 22.7,49.2 26.2,49.2 29.7,49.2 33.2,49.2 17.45,52.7 20.95,52.7 24.45,52.7 27.95,52.7 31.45,52.7 34.95,52.7 22.7,56.2 26.2,56.2 29.7,56.2 33.2,56.2 20.95,59.7 24.45,59.7 27.95,59.7 31.45,59.7 19.2,63.2 22.7,63.2 26.2,63.2 29.7,63.2 17.45,66.7 20.95,66.7 20.95,73.7 15.7,77.2 19.2,77.2 5.15,81.6 3.35,82.25 12.2,84.2 36.7,84.2 40.2,84.2 38.45,87.7 36.7,91.2 40.2,91.2
pads on no net: B1.1 B2.1 B3.1 B4.1 FTG1.FTG2 FTG2.FTG2 FTG3.FTG2 IC1.4 IC1.7 J3.5 J4.5 J5.5 J6.5 J7.5 J8.11 J8.12

## Polygon pours and split planes (outlines as drawn)
GND on Bottom Layer "NONET_L03_P-001" (solid, remove dead copper, pour order 7): 44.4,-1.8 42.9,-3.3 -2.2,-3.3 -4.3,-1.2 -4.3,105.8 -2.8,107.3 43.75,107.3 44.4,106.65 44.4,-1.75
P3V3 on Bottom Layer "NONET_L03_P-001" (solid, pour order 4): 25.5,69.5 27.65,69.5 27.95,69.8 29.9,69.8 30.3,69.4 30.3,68.75 29.85,68.3 29.85,66.9 28.5,65.55 26.45,65.55 25.35,66.65 25.35,69.25
NetIC1_2 on Bottom Layer "NONET_L03_P-001" (solid, remove dead copper, pour order 2): 29.8,69.9 28,69.9 27.75,69.65 26.35,69.65 26.225,69.775 26.225,71.725 26.5,72 27.55,72 27.925,71.625 29.825,71.625 30.05,71.4 30.05,70.15
NetC1_1 on Bottom Layer "NONET_L03_P-001" (solid, pour order 1): 35.4,61.15 35.85,61.6 35.85,64.008 36.3,64.552 36.3,69.95 35.963,70.25 33.3,70.25 32.8,69.75 32.8,68.65 33.206,68.244 33.155,61.15
P5V on Bottom Layer "NONET_L03_P-001" (solid, pour order 0): 40.725,64.775 40.725,75.925 34.1,82.55 12.35,82.55 9.25,85.65 5.95,85.65 5.3,85 5.3,82.65 8.4,79.55 33.05,79.55 37.4,75.2 37.4,64.85 37.35,64.85 36.1,63.6 36.1,7.55 39.2,4.45 41.65,4.45 42.55,5.35 42.55,62.95
GND on Top Layer "NONET_L03_P-001" (solid, remove dead copper, pour order 9): -2.1,-3.55 42.9,-3.55 44.35,-2.1 44.35,106.4 43.15,107.6 -2.9,107.6 -2.9,107.55 -4.6,105.85 -4.6,-0.45
P12V on Top Layer "NONET_L03_P-001" (solid, pour order 8): 33.6,92.95 33.6,66.2 31.4,64 25.5,64 25.5,64.1 22.05,67.55 22.05,81.65 18.2,85.55 3.05,85.55 1.95,84.45 1.95,82.3 3.15,81.1 9.95,81.1 15.65,75.4 15.65,7.4 15.55,7.3 26.5,-3.65 42.9,-3.65 44.45,-2.1 44.45,7.6 42.55,9.5 42.55,104.3 42.15,104.7 40.8,104.7 38.2,102.1 38.2,97.55
P3V3 on Top Layer "NONET_L03_P-001" (solid, pour order 5): 29.5,91.15 29.5,66.45 28.6,65.55 26.55,65.55 25.05,67.05 25.05,90.25 21.596,94 16.45,94 15.3,95.15 15.3,96 16.05,96.75 17.1,96.8 17.6,96.3 31,96.3 33,98.3 33,103.55 33.55,104.1 34.5,104.1 34.95,103.65 34.95,96.6
GND on Layer 2 "NONET_L03_P-001" (solid, pour order 10): 43.658,-3.457 43.658,-3.507 -1.942,-3.507 -4.542,-0.907 -4.542,105.743 -2.642,107.643 43.708,107.643 44.7,106.651 44.7,-2.468
P12V on Layer 2 "NONET_L03_P-001" (solid, pour order 6): 40.3,104.7 42.3,104.7 42.3,10 44.35,7.95 44.35,-2.3 43.3,-3.35 25.9,-3.35 15.4,7.15 15.4,75.1 9.8,80.7 3.65,80.7 2.25,82.1 2.25,87.1 3.9,88.75 29.05,88.75 38.3,98 38.3,102.7
no net on Top Solder "NONET_L03_P-001" (solid): 30.3,72.85 30.35,72.8 32.65,72.8 32.65,69.85 30.25,69.85 30.25,72.8
GND on Layer 1 "NONET_L03_P-001" (solid, pour order 3): 43.35,107.75 45,106.1 45,-2.6 43.9,-3.7 -2.2,-3.7 -4.4,-1.5 -4.4,106 -2.65,107.75

## Keep-outs
Keep-Out Layer:
  the board outline again, w0.127

## Silkscreen, mask and mechanical layers (free items; w line width, h text height)
Top Overlay:
  text "DIOT Backplane Mezzaine v.P_version" at 33.25,17.3 h1.52 r90
Mechanical 1:
  the board outline again, w0.127
Mechanical 5:
  lines w0.25: -5,100 29.5,100 29.5,108 ; 24.35,107.95 24.45,107.95
Mechanical 8:
  circle w0.1: c54.6,-2.5 r2.9
  circle w0.1: c54.6,60.5 r2.9
  circle w0.1: c53.55,56.2 r0.65
  circle w0.1: c54.6,-2.5 r1.35
  circle w0.1: c56.6,1.8 r0.65
  circle w0.1: c54.6,60.5 r1.35
  circle w0.1: c0,0 r1.35
  circle w0.1: c0,56.55 r1.35
  lines w0.1: -1,0 0,0 ; -1,56.55 0,56.55 ; 0,-1 0,0 ; 0,1 0,0 ; 0,55.55 0,56.55 ; 0,57.55 0,56.55 ; 1,0 0,0 ; 1,56.55 0,56.55 ; 52.55,56.2 53.55,56.2 ; 53.55,55.2 53.55,56.2 ; 53.55,57.2 53.55,56.2 ; 53.6,-2.5 54.6,-2.5 ; 53.6,60.5 54.6,60.5 ; 54.55,56.2 53.55,56.2 ; 54.6,-3.5 54.6,-2.5 ; 54.6,-1.5 54.6,-2.5 ; 54.6,59.5 54.6,60.5 ; 54.6,61.5 54.6,60.5 ; 55.6,-2.5 54.6,-2.5 ; 55.6,1.8 56.6,1.8 ; 55.6,60.5 54.6,60.5 ; 56.6,0.8 56.6,1.8 ; 56.6,2.8 56.6,1.8 ; 57.6,1.8 56.6,1.8 ; 61.3,4.2 62.3,4.2 ; 62.3,3.2 62.3,4.2 ; 62.3,5.2 62.3,4.2 ; 63.3,4.2 62.3,4.2

## Text inside footprints (layer, text, board x,y; h text height)
J3: Mechanical 14 "1" at 13.35,16.475 h1.2 r90; Bottom Overlay "1" at 13.35,16.475 h1.2 r90
J4: Mechanical 14 "1" at 13.35,31.475 h1.2 r90; Bottom Overlay "1" at 13.35,31.475 h1.2 r90
J5: Mechanical 14 "1" at 13.35,46.475 h1.2 r90; Bottom Overlay "1" at 13.35,46.475 h1.2 r90
J6: Mechanical 14 "1" at 13.35,61.475 h1.2 r90; Bottom Overlay "1" at 13.35,61.475 h1.2 r90
J7: Mechanical 14 "1" at 13.35,76.475 h1.2 r90; Bottom Overlay "1" at 13.35,76.475 h1.2 r90